# EAGLE board BSPD (EAGLE 8.6.2)
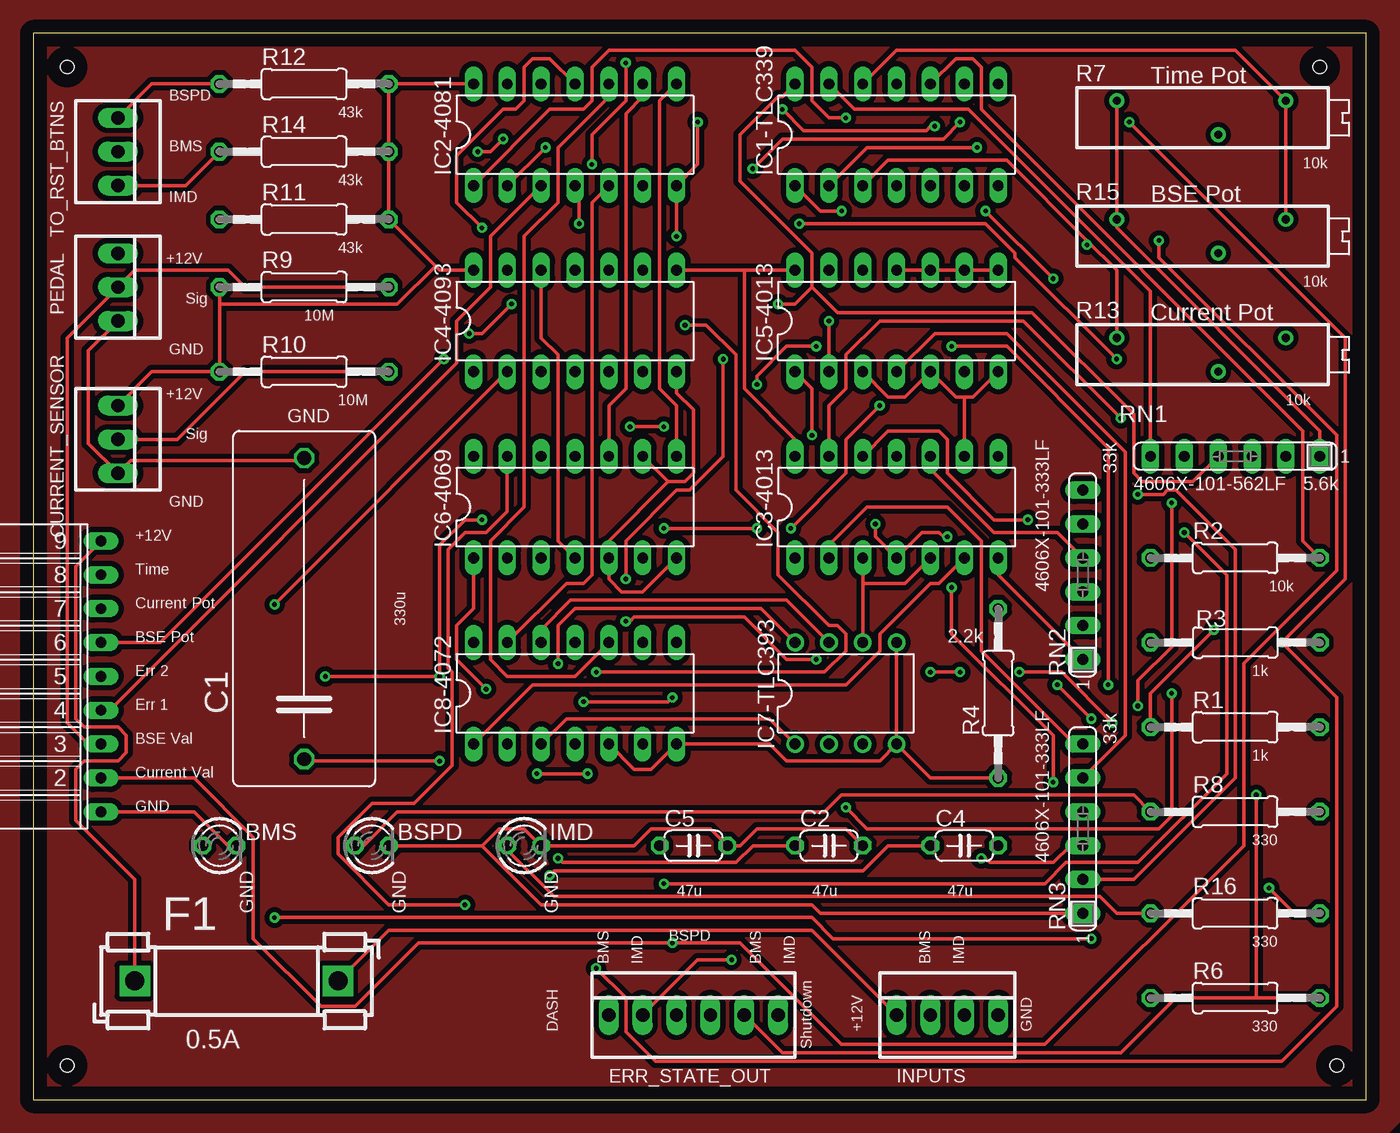
[diagram p0: board, top side]
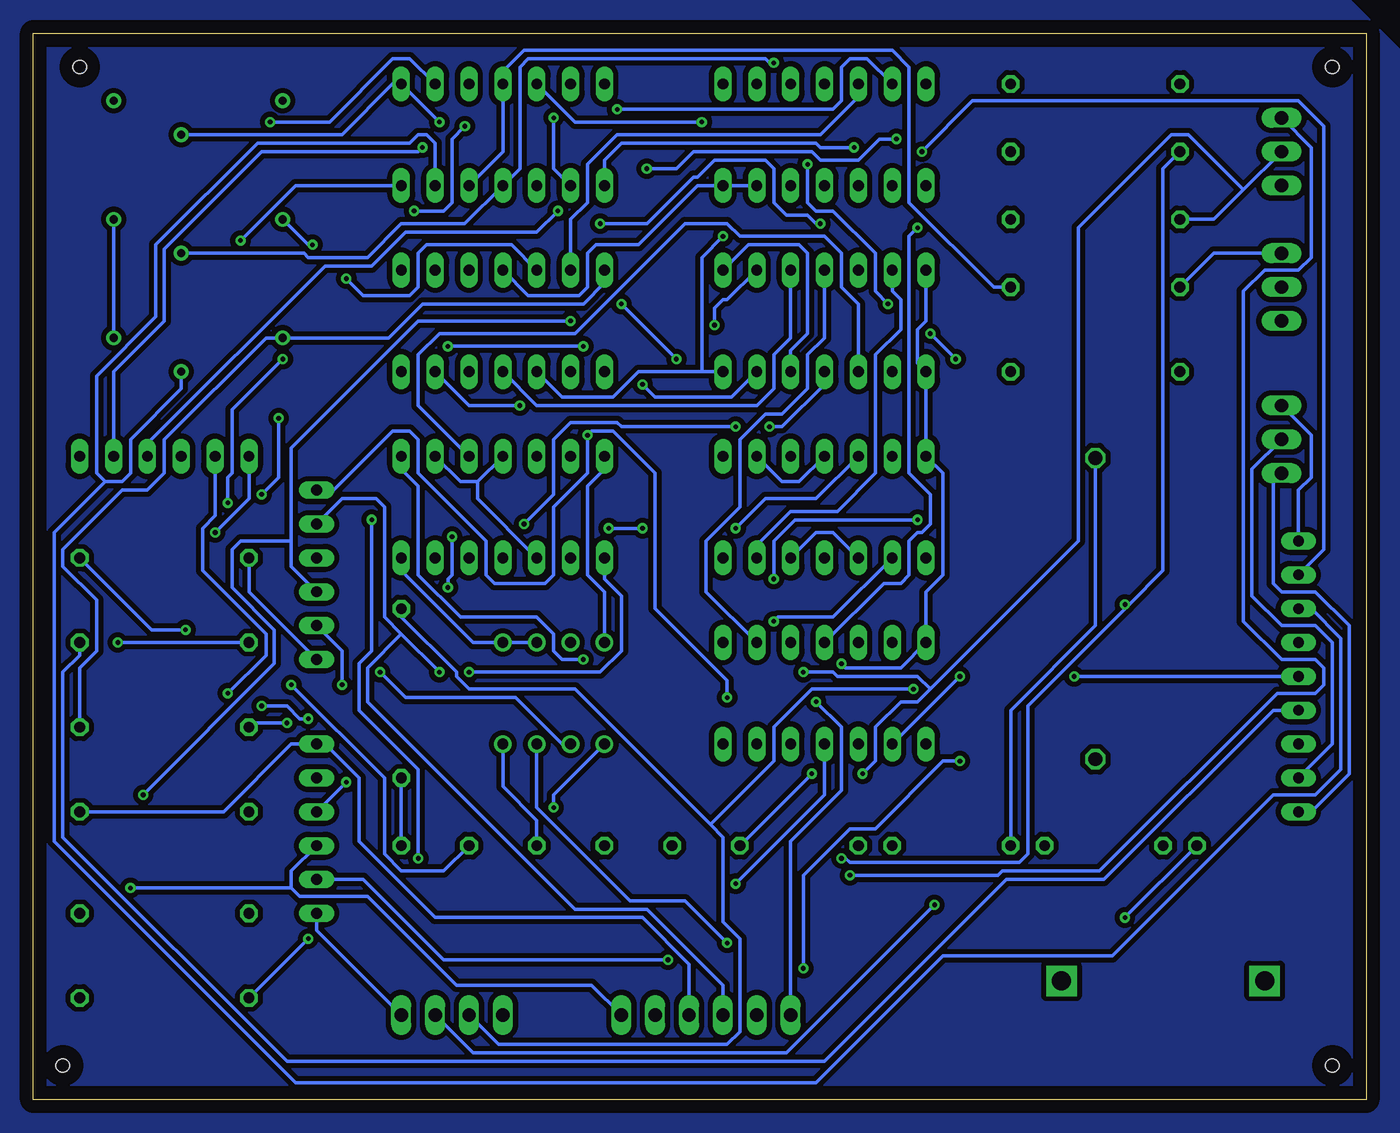
[diagram p1: board, bottom side, seen from below]

Size 100 x 80 mm. Coordinates in mm from the lower left corner, seen from the top.
Outline: 0,0 100,0 100,80 0,80 0,0
Copper layers (1*16): Top 0.035mm / dielectric 1.5mm / Bottom 0.035mm
Design rules "default *": minimum track width 10mil, minimum drill 0.35mm, track to track 15mil, track to pad 15mil, pad to pad 15mil, via to via 15mil, smd to smd 15mil, copper to edge 40mil, drill to drill 6mil, minimum pad ring 10mil, minimum via ring 8mil, stop-mask expansion 4mil, vias tented up to drill 0mil, thermal gap 10mil
Holes 1 mm at 2.54,77.47 2.54,2.54 97.79,2.54 96.52,77.47

## Footprints (pad centres in the part's own frame; a part is rotated, then mirrored left to right if it is on the bottom)
LED3MM = drill 0.813 octagon: A -1.27,0; K 1.27,0
C225-108X268 = drill 1.016 octagon: 1 -11.303,0; 2 11.303,0
C050-024X044 = drill 0.813 octagon: 1 -2.54,0; 2 2.54,0
22-23-2031 = drill 1 long: 1 -2.54,0; 2 0,0; 3 2.54,0
22-23-2061 = drill 1 long: 1 -6.35,0; 2 -3.81,0; 3 -1.27,0; 4 1.27,0; 5 3.81,0; 6 6.35,0
FUSE_HOLDER_5X20MM = drill 1.422 pad 2.286 square: 1 0,0; 2 15.24,0
DIL14 = drill 0.813 long: 1 -7.62,-3.81; 2 -5.08,-3.81; 3 -2.54,-3.81; 4 0,-3.81; 5 2.54,-3.81; 6 5.08,-3.81; 7 7.62,-3.81; 8 7.62,3.81; 9 5.08,3.81; 10 2.54,3.81; 11 0,3.81; 12 -2.54,3.81; 13 -5.08,3.81; 14 -7.62,3.81
DIL08 = drill 0.813 pad 1.27: 1 -3.81,-3.81; 2 -1.27,-3.81; 3 1.27,-3.81; 4 3.81,-3.81; 5 3.81,3.81; 6 1.27,3.81; 7 -1.27,3.81; 8 -3.81,3.81
22-23-2041 = drill 1 long: 1 -3.81,0; 2 -1.27,0; 3 1.27,0; 4 3.81,0
0207/12 = drill 0.813 octagon: 1 -6.35,0; 2 6.35,0
RTRIM3006P = drill 0.61: 1 -7.62,1.27; 2 0,-1.27; 3 5.08,1.27
SIL6 = drill 0.813 long: 1 -6.35,0; 2 -3.81,0; 3 -1.27,0; 4 1.27,0; 5 3.81,0; 6 6.35,0
FE09W = drill 0.813 long: 1 -10.16,0; 2 -7.62,0; 3 -5.08,0; 4 -2.54,0; 5 0,0; 6 2.54,0; 7 5.08,0; 8 7.62,0; 9 10.16,0

## Placement (x,y rotation side)
BMS  LED3  [LED3MM]  13.97,19.05 0 top
BSPD  LED2  [LED3MM]  25.4,19.05 0 top
C1  330u  [C225-108X268]  20.32,36.83 90 top
C2  47uF  [C050-024X044]  59.69,19.05 0 top
C4  47uF  [C050-024X044]  69.85,19.05 0 top
C5  47uF  [C050-024X044]  49.53,19.05 0 top
CURRENT_SENSOR  22-23-2031  [22-23-2031]  6.35,49.53 270 top
ERR_STATE_OUT  22-23-2061  [22-23-2061]  49.53,6.35 0 top
F1  FUSEBLANK_5X20MM  [FUSE_HOLDER_5X20MM]  7.62,8.89 0 top
IC1-TLC339  TLC339P  [DIL14]  64.77,72.39 0 top
IC2-4081  4081N  [DIL14]  40.64,72.39 0 top
IC3-4013  4013N  [DIL14]  64.77,44.45 0 top
IC4-4093  4093N  [DIL14]  40.64,58.42 0 top
IC5-4013  4013N  [DIL14]  64.77,58.42 0 top
IC6-4069  4069N  [DIL14]  40.64,44.45 0 top
IC7-TLC393  TLC393P  [DIL08]  60.96,30.48 0 top
IC8-4072  4072N  [DIL14]  40.64,30.48 0 top
IMD  LED4  [LED3MM]  36.83,19.05 0 top
INPUTS  22-23-2041  [22-23-2041]  68.58,6.35 0 top
PEDAL  22-23-2031  [22-23-2031]  6.35,60.96 270 top
R1  1k  [0207/12]  90.17,27.94 0 top
R2  10k  [0207/12]  90.17,40.64 0 top
R3  1k  [0207/12]  90.17,34.29 180 top
R4  2.2k  [0207/12]  72.39,30.48 90 top
R6  330  [0207/12]  90.17,7.62 0 top
R7  10k  [RTRIM3006P]  88.9,73.66 0 top
R8  330  [0207/12]  90.17,21.59 0 top
R9  10M  [0207/12]  20.32,60.96 0 top
R10  10M  [0207/12]  20.32,54.61 0 top
R11  43k  [0207/12]  20.32,66.04 0 top
R12  43k  [0207/12]  20.32,76.2 0 top
R13  10k  [RTRIM3006P]  88.9,55.88 0 top
R14  43k  [0207/12]  20.32,71.12 0 top
R15  10k  [RTRIM3006P]  88.9,64.77 0 top
R16  330  [0207/12]  90.17,13.97 0 top
RN1  5.1k  [SIL6]  90.17,48.26 180 top
RN2  33k  [SIL6]  78.74,39.37 90 top
RN3  33k  [SIL6]  78.74,20.32 90 top
S7042-ND  [FE09W]  5.08,31.75 90 top
TO_RST_BTNS  22-23-2031  [22-23-2031]  6.35,71.12 270 top

## Library data of the parts
BMS BSPD IMD = led
C1 C2 C4 C5 = rcl; SPICEPREFIX: C
CURRENT_SENSOR PEDAL TO_RST_BTNS = con-molex; MF: MOLEX; MPN: 22-23-2031; OC_FARNELL: 1462950; OC_NEWARK: 30C0862
ERR_STATE_OUT = con-molex; MF: MOLEX; MPN: 22-23-2061; OC_FARNELL: 1462922; OC_NEWARK: 27C1933
F1 = fuse; OC_FARNELL: unknown; OC_NEWARK: unknown
IC1-TLC339 IC7-TLC393 = linear
IC2-4081 IC3-4013 IC4-4093 IC5-4013 IC6-4069 IC8-4072 = 40xx
INPUTS = con-molex; MF: MOLEX; MPN: 22-23-2041; OC_FARNELL: 1462920; OC_NEWARK: 38C0355
R1-R4 R6 R8-R12 R14 R16 = rcl; SPICEPREFIX: R
R7 R13 R15 = rcl; SPICEMODEL: X; SPICEPREFIXL: POT
RN1-RN3 = resistor-sil; OC_FARNELL: unknown; OC_NEWARK: unknown
S7042-ND = con-lsta; OC_FARNELL: unknown; OC_NEWARK: unknown

## Nets
+12V: CURRENT_SENSOR.1 F1.1 IC1-TLC339.3 IC2-4081.14 IC3-4013.14 IC4-4093.1 IC4-4093.5 IC4-4093.8 IC4-4093.14 IC5-4013.14 IC6-4069.14 IC7-TLC393.8 IC8-4072.14 PEDAL.1 R1.2 R7.1 R9.1 R10.1 R11.2 R12.2 R13.1 R14.2 R15.1 RN1.1 S7042-ND.9
BMS: IC6-4069.13 INPUTS.3
BMS_DASH: ERR_STATE_OUT.1 IC5-4013.1 RN2.6
BMS_ERR: ERR_STATE_OUT.5 IC5-4013.2 R6.2 RN2.3
BMS_RST: IC4-4093.10 IC5-4013.4 RN3.5
BSE: IC1-TLC339.5 IC1-TLC339.11 PEDAL.2 R9.2 S7042-ND.3
BSE_POT: IC1-TLC339.4 R15.2 S7042-ND.6
BSE_UNPLUGGED: IC1-TLC339.13 IC8-4072.4 RN1.6
BSPD_DASH: ERR_STATE_OUT.3 IC3-4013.1 RN2.5
BSPD_ERR: ERR_STATE_OUT.4 IC3-4013.2 R8.2 RN3.6
BSPD_RST: IC3-4013.4 IC4-4093.4 RN3.4
CURR_UNPLUGGED: IC7-TLC393.1 IC8-4072.3 RN1.5
CURRENT_POT: IC1-TLC339.6 R13.2 S7042-ND.7
CURRENT_SENSOR: CURRENT_SENSOR.2 IC1-TLC339.7 IC7-TLC393.3 R10.2 S7042-ND.2
ERROR_1: IC2-4081.3 R3.1 S7042-ND.4
ERROR_2: IC1-TLC339.14 IC8-4072.2 RN1.4 S7042-ND.5
ERROR_3: IC3-4013.6 IC8-4072.1
ESO_BMS_RST: C5.1 IC4-4093.9 R11.1 TO_RST_BTNS.2
ESO_BSPD_RST: C4.1 IC4-4093.6 R12.1 TO_RST_BTNS.1
ESO_IMD_RST: C2.1 IC4-4093.2 R14.1 TO_RST_BTNS.3
GND: BMS.K BSPD.K C1.2 C2.2 C4.2 C5.2 CURRENT_SENSOR.3 IC1-TLC339.12 IC2-4081.6 IC2-4081.7 IC3-4013.3 IC3-4013.5 IC3-4013.7 IC3-4013.9 IC3-4013.11 IC4-4093.7 IC5-4013.3 IC5-4013.5 IC5-4013.7 IC5-4013.8 IC5-4013.9 IC5-4013.10 IC5-4013.11 IC6-4069.3 IC6-4069.5 IC6-4069.7 IC6-4069.9 IC6-4069.11 IC7-TLC393.4 IC7-TLC393.5 IC7-TLC393.6 IC8-4072.5 IC8-4072.7 IMD.K INPUTS.4 PEDAL.3 R2.1 R4.1 R7.3 R13.3 R15.3 RN2.1 RN3.1 S7042-ND.1
IMD: IC6-4069.1 INPUTS.2 R4.2
IMD_DASH: ERR_STATE_OUT.2 IC3-4013.13 RN3.2
IMD_ERR: ERR_STATE_OUT.6 IC3-4013.12 R16.2 RN3.3
IMD_RST: IC3-4013.10 IC4-4093.3 RN2.4
N$1: IC1-TLC339.2 IC2-4081.1 RN1.2
N$2: IC1-TLC339.1 IC2-4081.2 RN1.3
N$4: F1.2 INPUTS.1
N$5: IC3-4013.8 IC6-4069.2
N$6: C1.1 IC1-TLC339.9 R3.2
N$7: IC7-TLC393.7 IC8-4072.12
N$8: IC4-4093.11 IC8-4072.9
N$9: BMS.A R6.1
N$10: IC4-4093.12 IC6-4069.4
N$11: IC2-4081.10 IC8-4072.10
N$12: IC2-4081.11 IC8-4072.11
N$13: IC4-4093.13 IC6-4069.6
N$14: IC5-4013.6 IC6-4069.12
N$15: IMD.A R16.1
N$16: IC2-4081.9 IC6-4069.10
N$17: IC2-4081.8 IC6-4069.8
N$19: IC2-4081.5 IC8-4072.13
N$21: BSPD.A R8.1
N$22: IC2-4081.12 IC5-4013.13
N$23: IC2-4081.13 IC5-4013.12
N$24: IC2-4081.4 RN2.2
TIMED_POT: IC1-TLC339.8 R7.2 S7042-ND.8
UNPLUG: IC1-TLC339.10 IC7-TLC393.2 R1.1 R2.2

## Tracks (layer width: path | path; a pad name or v marks a point on that pad's centre or on a via)
+12V  (via drill 0.35)
  Top 0.254: IC4-4093.14 30.48,62.23 30.16,62.55 | 30.16,62.55 R11.2 R14.2 R12.2 IC2-4081.14 | R9.1 13.97,59.69 | 13.97,59.69 R10.1 8.89,54.61 CURRENT_SENSOR.1 | F1.1 7.62,16.51 3.17,20.95 3.17,24.77 3.81,25.4 6.35,25.4 6.99,26.04 6.99,27.3 6.35,27.94 3.81,27.94 3.17,28.57 3.17,40.01 S7042-ND.9 | 30.16,62.55 27.3,59.69 13.97,59.69 | R7.1 R15.1 81.28,65.41 96.52,50.16 RN1.1 | IC1-TLC339.3 64.14,70.48 73.03,70.48 79.06,64.45 | 79.06,64.45 81.28,62.23 R13.1 | IC5-4013.14 53.34,62.23 | 53.34,62.23 IC4-4093.8 | IC3-4013.14 57.15,49.53 53.34,53.34 53.34,62.23 | 79.06,64.45 v79.06,64.14 | v39.37,32.7 39.37,35.56 40.64,36.83 54.61,36.83 IC7-TLC393.8
  Bottom 0.254: IC4-4093.14 33.02,58.42 33.66,57.78 33.66,55.24 IC4-4093.1 IC6-4069.14 31.75,46.99 31.75,39.37 33.02,38.1 IC8-4072.14 34.92,32.38 39.05,32.38 v39.37,32.7 | PEDAL.1 11.43,63.5 R9.1 | S7042-ND.9 5.08,45.72 4.13,46.67 4.13,49.85 CURRENT_SENSOR.1 | IC7-TLC393.8 57.15,38.1 58.42,39.37 58.42,46.04 57.15,47.31 IC3-4013.14 | IC4-4093.5 43.18,56.2 41.91,57.47 41.91,63.5 42.55,64.14 46.35,64.14 IC4-4093.8 | IC5-4013.14 57.15,61.28 58.74,59.69 70.8,59.69 73.34,57.15 R13.1 82.55,57.15 90.17,49.53 90.17,46.99 91.44,45.72 93.34,45.72 97.79,41.27 97.79,40.01 95.25,37.47 95.25,33.66 96.52,32.38 R1.2 | R15.1 79.38,64.14 v79.06,64.14
BMS  (via drill 0.35)
  Top 0.254: IC6-4069.13 35.56,44.13 33.97,42.55 32.38,42.55 31.11,41.27 31.11,32.38 31.43,32.07 31.43,25.08 28.57,22.23 25.4,22.23 22.86,19.68 22.86,18.41 26.67,14.61 v32.38,14.61
  Bottom 0.254: v32.38,14.61 43.5,3.49 66.99,3.49 INPUTS.3
BMS_DASH  (via drill 0.35)
  Top 0.254: v58.42,49.85 58.42,53.34 IC5-4013.1 | v41.27,29.84 47.62,29.84 v47.94,30.16
  Bottom 0.254: RN2.6 77.47,45.72 73.03,50.16 71.75,50.16 71.12,49.53 71.12,46.99 66.04,41.91 66.04,39.37 65.41,38.73 61.59,38.73 60.96,39.37 60.96,44.45 58.42,46.99 v58.42,49.85 58.1,50.16 56.52,50.16 53.34,46.99 53.34,36.83 47.94,31.43 v47.94,30.16 | ERR_STATE_OUT.1 43.18,19.37 39.37,23.18 39.37,27.94 v41.27,29.84
BMS_ERR  (via drill 0.35)
  Top 0.254: v59.69,58.42 IC5-4013.2 | 91.76,7.62 85.72,7.62 81.6,3.49 56.2,3.49 ERR_STATE_OUT.5 | 91.76,7.62 R6.2 | 91.76,7.62 v91.76,22.86
  Bottom 0.254: v59.69,58.42 71.12,58.42 80.64,48.9 80.64,41.91 | 80.64,41.91 80.64,40.01 RN2.3 | 80.64,41.91 84.45,41.91 85.09,41.27 85.09,38.42 81.92,35.24 81.92,32.7 v91.76,22.86
BMS_RST
  Top 0.254: RN3.5 81.92,27.3 81.92,48.58 73.03,57.47 67.63,57.47 IC5-4013.4
  Bottom 0.254: IC4-4093.10 43.18,57.15 44.45,55.88 44.45,53.34 45.72,52.07 62.23,52.07 IC5-4013.4
BSE
  Top 0.254: S7042-ND.3 4.13,26.67 2.54,28.26 2.54,57.15 PEDAL.2 7.62,62.23 14.61,62.23 15.88,60.96 R9.2
  Bottom 0.254: IC1-TLC339.5 64.77,71.12 IC1-TLC339.11 64.77,77.15 63.18,78.74 35.56,78.74 34.29,77.47 34.29,67.31 27.94,60.96 R9.2
BSE_POT  (via drill 0.35)
  Top 0.254: S7042-ND.6 9.53,34.29 v30.8,55.56 | v32.7,57.47 33.66,57.47 v35.88,59.69 | v41.91,70.17 41.91,72.39 44.45,74.93 v44.45,77.79
  Bottom 0.254: R15.2 79.69,63.5 79.38,63.18 74.93,63.18 72.39,65.72 67.63,65.72 IC1-TLC339.4 63.5,69.85 63.5,77.47 62.87,78.11 45.09,78.11 44.77,77.79 v44.45,77.79 | v32.7,57.47 v30.8,55.56 | v35.88,59.69 36.83,60.64 36.83,63.5 40.01,66.67 41.27,66.67 41.91,67.31 v41.91,70.17
BSE_UNPLUGGED  (via drill 0.35)
  Top 0.254: v47.31,16.19 75.88,16.19 77.47,17.78 82.87,17.78 89.53,24.45 89.53,39.37 v86.36,42.55 | IC1-TLC339.13 61.59,74.3 70.17,74.3 83.82,60.64 RN1.6
  Bottom 0.254: IC8-4072.4 40.64,22.86 v47.31,16.19 | v86.36,42.55 83.82,45.09 RN1.6
BSPD_DASH  (via drill 0.35)
  Top 0.254: v69.53,32.07 v67.31,32.07
  Bottom 0.254: IC3-4013.1 57.15,39.05 55.88,37.78 55.88,33.66 57.47,32.07 v67.31,32.07 | 72.39,34.92 73.66,36.2 73.66,44.45 74.3,45.09 76.83,45.09 RN2.5 | 72.39,34.92 v69.53,32.07 | ERR_STATE_OUT.3 48.26,8.57 53.98,14.29 59.37,14.29 74.93,29.84 74.93,32.38 72.39,34.92
BSPD_ERR
  Top 0.254: IC3-4013.2 59.69,41.59 62.55,44.45 68.58,44.45 71.12,41.91 71.12,33.66 78.11,26.67 RN3.6
  Bottom 0.254: R8.2 85.72,21.59 80.64,26.67 RN3.6 78.11,26.67 75.56,24.13 75.56,19.37 69.85,13.65 54.29,13.65 50.8,10.16 ERR_STATE_OUT.4
BSPD_RST  (via drill 0.35)
  Top 0.254: v47.31,50.48 v44.77,50.48 | v63.18,43.18 63.18,42.23 IC3-4013.4 66.67,42.55 67.94,42.55 68.26,42.23 v68.58,42.23 | v76.52,23.81 76.52,27.3 68.9,34.92 v68.9,38.42
  Bottom 0.254: IC4-4093.4 40.64,53.66 43.81,50.48 v44.77,50.48 | v47.31,50.48 55.88,50.48 56.2,50.8 59.69,50.8 60.96,49.53 60.96,45.4 v63.18,43.18 | v76.52,23.81 RN3.4 | v68.9,38.42 68.9,39.05 68.58,39.37 v68.58,42.23
CURR_UNPLUGGED  (via drill 0.35)
  Top 0.254: IC8-4072.3 40.01,28.57 55.24,28.57 IC7-TLC393.1 | v85.41,30.48 85.41,21.27 84.45,20.32 62.55,20.32 v60.96,21.91
  Bottom 0.254: RN1.5 86.36,43.81 87.31,42.86 87.31,39.69 82.55,34.92 82.55,33.34 v85.41,30.48 | v60.96,21.91 60.96,22.86 IC7-TLC393.1
CURRENT_POT
  Bottom 0.254: R13.2 88.9,53.34 92.71,49.53 92.71,46.99 93.34,46.35 94.61,46.35 | 94.61,46.35 95.25,46.99 95.25,54.29 90.81,58.74 90.81,64.14 83.19,71.75 71.75,71.75 71.12,72.39 70.48,72.39 69.85,71.75 IC1-TLC339.6 | S7042-ND.7 4.13,36.83 1.91,34.61 1.91,24.77 3.81,22.86 6.99,22.86 19.05,10.79 31.75,10.79 41.27,1.27 80.33,1.27 98.42,19.37 98.42,42.55 94.61,46.35
CURRENT_SENSOR  (via drill 0.35)
  Top 0.254: R10.2 15.88,54.61 10.79,49.53 CURRENT_SENSOR.2 | S7042-ND.2 12.06,24.13 16.51,19.68 16.51,12.06 21.59,6.99 24.13,6.99 28.89,11.75 v47.94,11.75 53.02,11.75 60.64,4.13 75.88,4.13 90.81,19.05 90.81,32.7 97.79,39.69 97.79,49.85 84.45,63.18 v84.45,64.45
  Bottom 0.254: S7042-ND.2 2.54,26.67 2.54,34.29 3.81,35.56 6.35,35.56 8.57,37.78 8.57,47.31 CURRENT_SENSOR.2 | IC7-TLC393.3 62.23,21.91 55.24,14.92 51.12,14.92 v47.94,11.75 | IC1-TLC339.7 80.33,68.58 v84.45,64.45
ERROR_1
  Top 0.254: S7042-ND.4 5.71,29.21 31.75,55.24 31.75,58.42 34.29,60.96 34.29,64.77 IC2-4081.3
  Bottom 0.254: R3.1 96.52,33.34 97.79,32.07 97.79,19.68 80.96,2.86 40.64,2.86 26.99,16.51 19.68,16.51 6.99,29.21 S7042-ND.4
ERROR_2  (via drill 0.35)
  Top 0.254: v21.91,31.75 v30.48,31.75 30.48,41.59 32.38,43.5 v33.66,43.5 | IC1-TLC339.14 56.2,75.25 55.88,75.25 53.02,72.39 53.02,68.9 58.42,63.5 58.42,60.96 | 58.42,60.96 60.33,59.05 74.93,59.05 82.55,51.44 82.55,46.99 83.19,46.35 87,46.35 RN1.4 | v44.45,39.05 44.45,41.91 48.26,45.72 49.21,45.72 51.75,48.26 v51.75,55.56 | v55.88,59.69 57.15,59.69 58.42,60.96
  Bottom 0.254: v21.91,31.75 S7042-ND.5 | IC8-4072.2 v30.48,31.75 | v33.66,43.5 42.86,43.5 44.45,41.91 v44.45,39.05 | v55.88,59.69 v51.75,55.56
ERROR_3
  Top 0.254: IC8-4072.1 37.47,31.11 60.96,31.11 63.5,33.66 63.5,34.92 67.31,38.73 67.94,38.73 IC3-4013.6
ESO_BMS_RST  (via drill 0.35)
  Top 0.254: v37.78,24.45 v41.59,24.45 | v48.9,58.1 50.48,58.1 52.7,55.88 52.7,45.72 55.88,42.55 55.88,39.37 59.69,35.56 60.33,35.56 60.96,34.92 60.96,33.66 59.37,32.07 v42.23,32.07
  Bottom 0.254: R11.1 11.43,66.04 9.21,68.26 | TO_RST_BTNS.2 9.21,68.26 | v41.59,24.45 C5.1 | v37.78,24.45 36.83,25.4 36.83,27.94 34.92,29.84 33.66,29.84 32.7,30.8 | 32.7,30.8 21.59,41.91 21.59,65.41 14.61,72.39 13.34,72.39 9.21,68.26 | IC4-4093.9 47.94,60.01 48.26,60.01 48.9,59.37 v48.9,58.1 | v42.23,32.07 40.01,32.07 39.69,31.75 33.66,31.75 32.7,30.8
ESO_BSPD_RST  (via drill 0.35)
  Top 0.254: C4.1 64.14,19.05 62.23,17.14 39.05,17.14 v38.73,16.83 | v54.29,53.66 54.29,54.29 56.52,56.52 v58.74,56.52 | v68.9,56.52 73.03,56.52 80.64,48.9 v80.64,31.11 | R12.1 8.89,76.2 TO_RST_BTNS.1
  Bottom 0.254: v38.73,16.83 27.62,16.83 27.3,17.14 20,17.14 6.67,30.48 3.81,30.48 3.17,31.11 3.17,32.38 3.81,33.02 6.35,33.02 9.21,35.88 9.21,60.64 7.62,62.23 5.08,62.23 4.13,63.18 4.13,71.44 TO_RST_BTNS.1 | IC4-4093.6 47.62,52.7 53.34,52.7 v54.29,53.66 | v68.9,56.52 v58.74,56.52 | v80.64,31.11 73.66,24.13 73.66,18.41 72.39,17.14 69.22,17.14 C4.1
ESO_IMD_RST  (via drill 0.35)
  Top 0.254: C2.1 53.98,19.05 52.7,17.78 39.69,17.78 v39.37,18.1 | v18.1,37.15 IC4-4093.2 | TO_RST_BTNS.3 11.43,68.58 R14.1
  Bottom 0.254: v39.37,18.1 39.05,18.1 38.73,17.78 26.04,17.78 25.4,18.41 25.4,29.53 17.78,37.15 | 17.78,37.15 15.24,39.69 15.24,69.85 R14.1 | 17.78,37.15 v18.1,37.15
GND  (via drill 0.35)
  Top 0.254: BMS.K 14.61,19.05 12.06,21.59 S7042-ND.1 | PEDAL.3 4.13,56.2 4.13,49.21 CURRENT_SENSOR.3 7.3,47.94 20.32,47.94 C1.2 | R15.3 R7.3 90.17,78.74 64.77,78.74 IC1-TLC339.12 | IC5-4013.11 IC5-4013.10 IC5-4013.9 IC5-4013.8 | IC6-4069.7 45.72,38.1 44.13,38.1 43.18,39.05 IC6-4069.5 43.18,41.91 47.62,46.35 | IC4-4093.7 48.26,53.02 49.53,51.75 49.53,46.99 48.9,46.35 47.62,46.35 | IC6-4069.9 47.62,46.35 | IC3-4013.7 72.39,39.37 RN2.1 | IC5-4013.3 64.14,52.7 65.41,52.7 IC5-4013.5 69.22,52.7 69.85,52.7 | IC5-4013.7 70.48,52.7 69.85,52.7 | 69.85,52.7 IC3-4013.9 | 33.66,19.05 BSPD.K | 33.66,19.05 34.92,20.32 36.83,20.32 IMD.K 45.09,19.05 46.35,20.32 50.8,20.32 C5.2 53.02,19.05 54.29,20.32 60.96,20.32 C2.2 | IC8-4072.5 45.09,24.77 46.35,24.77 IC8-4072.7 55.24,26.67 56.52,25.4 63.5,25.4 IC7-TLC393.4 | IC7-TLC393.6 62.23,38.73 | 62.23,38.73 IC3-4013.3 | IC7-TLC393.5 IC7-TLC393.4 | IC3-4013.5 65.41,38.73 62.23,38.73 | R4.1 67.31,24.13 IC7-TLC393.4 | RN3.1 59.05,13.97 58.42,14.61 38.1,14.61 33.66,19.05 | v48.26,64.77 IC2-4081.7 49.85,70.17 v49.85,73.34
  Bottom 0.254: S7042-ND.1 4.13,21.59 1.27,24.45 1.27,35.56 3.81,38.1 6.35,38.1 6.99,38.73 6.99,46.35 CURRENT_SENSOR.3 | R15.3 R13.3 | IC2-4081.6 IC2-4081.7 50.16,68.58 54.61,64.14 57.78,64.14 58.42,63.5 58.42,60.96 59.05,60.33 62.87,60.33 IC5-4013.11 | IC6-4069.3 40.01,42.55 41.27,42.55 IC6-4069.5 | IC6-4069.11 42.55,46.35 43.81,46.35 IC6-4069.9 | R2.1 83.82,38.1 RN2.1 | 66.67,46.35 IC3-4013.11 | 66.67,46.35 67.94,46.35 IC3-4013.9 | RN3.1 78.74,12.7 INPUTS.4 | R4.1 C4.2 | IC7-TLC393.6 IC7-TLC393.5 66.99,34.29 72.39,39.69 IC3-4013.7 | C2.2 62.23,20.95 64.77,23.5 IC7-TLC393.4 | 66.67,46.35 66.67,45.09 IC3-4013.3 | 49.85,54.61 54.61,54.61 56.52,52.7 60.33,52.7 IC5-4013.3 | 49.85,54.61 IC4-4093.7 | v48.26,64.77 49.85,63.18 49.85,54.61 | IC1-TLC339.12 59.37,73.34 v49.85,73.34 | C1.2 20.32,35.56 26.67,29.21 BSPD.K
IMD  (via drill 0.35)
  Top 0.254: IC6-4069.1 33.02,36.83 31.75,35.56 31.75,33.02 v33.97,30.8
  Bottom 0.254: R4.2 72.39,36.2 68.26,32.07 68.26,31.75 67.31,30.8 59.37,30.8 49.21,20.64 | 49.21,20.64 48.26,19.68 48.26,13.34 46.99,12.06 46.99,5.08 47.94,4.13 65.09,4.13 INPUTS.2 | v33.97,30.8 41.59,30.8 44.45,27.94 44.45,25.4 49.21,20.64
IMD_DASH  (via drill 0.35)
  Top 0.254: v52.39,10.48 49.85,10.48 ERR_STATE_OUT.2 | IC3-4013.13 59.69,52.07 60.96,53.34 60.96,55.88 63.5,58.42 74.3,58.42 v81.6,51.12 | v82.87,45.4 84.77,45.4 85.09,45.72 85.72,45.72 90.17,41.27 90.17,24.13 82.55,16.51 RN3.2
  Bottom 0.254: RN3.2 75.25,16.51 69.22,10.48 v52.39,10.48 | v81.6,51.12 81.6,46.67 v82.87,45.4
IMD_ERR  (via drill 0.35)
  Top 0.254: IC3-4013.12 64.14,50.16 67.94,50.16 68.58,49.53 68.58,46.99 72.07,43.5 v74.61,43.5 | v71.12,18.1 71.44,18.1 71.75,17.78 76.52,17.78 77.79,19.05 RN3.3 | R16.2 94.61,13.97 v92.71,15.88
  Bottom 0.254: RN3.3 80.64,17.14 80.64,15.88 | 80.64,15.88 80.01,15.24 74.93,15.24 68.26,8.57 58.1,8.57 ERR_STATE_OUT.6 | v74.61,43.5 74.61,33.66 75.56,32.7 75.56,29.21 71.12,24.77 v71.12,18.1 | 80.64,15.88 v92.71,15.88
IMD_RST
  Top 0.254: IC3-4013.10 67.31,47.31 72.07,42.55 76.83,42.55 RN2.4
  Bottom 0.254: IC4-4093.3 38.1,59.69 39.37,60.96 39.37,63.5 40.64,64.77 46.99,64.77 47.94,65.72 51.12,65.72 59.37,57.47 69.53,57.47 71.12,55.88 71.12,52.07 IC3-4013.10
N$1  (via drill 0.35)
  Top 0.254: IC2-4081.1 38.73,74.3 41.27,74.3 41.91,74.93 41.91,77.47 43.18,78.74 57.15,78.74 58.42,77.47 58.42,74.93 59.69,73.66 v60.96,73.66 | v70.8,71.44 62.55,71.44 IC1-TLC339.2
  Bottom 0.254: v60.96,73.66 60.96,69.85 IC1-TLC339.2 | RN1.2 93.98,54.61 90.17,58.42 90.17,63.82 82.87,71.12 71.12,71.12 v70.8,71.44
N$2  (via drill 0.35)
  Top 0.254: v38.42,71.44 IC2-4081.2 | v60.64,66.67 59.05,66.67 IC1-TLC339.1
  Bottom 0.254: v38.42,71.44 40.96,71.44 41.27,71.75 55.88,71.75 57.15,70.48 IC1-TLC339.1 | RN1.3 91.44,49.21 78.11,62.55 74.61,62.55 72.07,65.09 62.23,65.09 v60.64,66.67
N$3
  pour Top: -3.81,82.55 -3.81,-1.27 -1.27,-3.81 100.33,-3.81 105.41,1.27 105.41,82.55
N$4
  Top 0.254: INPUTS.1 58.42,12.7 26.67,12.7 F1.2
N$5  (via drill 0.35)
  Top 0.254: v44.45,35.88 44.77,35.88 45.09,36.2 53.34,36.2 56.52,33.02 v58.74,33.02
  Bottom 0.254: IC6-4069.2 40.01,36.2 44.13,36.2 v44.45,35.88 | v58.74,33.02 60.33,33.02 60.96,33.66 60.96,34.92 62.23,36.2 67.94,36.2 71.12,39.37 71.12,46.04 72.39,47.31 IC3-4013.8
N$6  (via drill 0.35)
  Top 0.254: v82.23,73.34 98.42,57.15 98.42,39.05 v93.66,34.29 97.79,30.16 97.79,6.99 93.66,2.86 46.67,2.86 44.45,5.08 44.45,7.62 v42.23,9.84 | v30.48,25.4 20.32,25.4 C1.1
  Bottom 0.254: v93.66,34.29 R3.2 | v82.23,73.34 77.79,73.34 73.03,78.11 71.75,78.11 IC1-TLC339.9 | v30.48,25.4 31.75,25.4 36.83,20.32 38.73,20.32 42.23,16.83 v42.23,9.84
N$7
  Top 0.254: IC8-4072.12 38.1,35.24 40.32,37.47 56.52,37.47 IC7-TLC393.7
N$8
  Bottom 0.254: IC4-4093.11 40.64,57.15 41.91,55.88 41.91,53.34 43.81,51.44 45.09,51.44 46.99,49.53 46.99,44.45 49.53,41.91 49.53,38.1 IC8-4072.9
N$9  (via drill 0.35)
  Top 0.254: v79.38,12.06 60.01,12.06 58.42,13.65 v18.1,13.65
  Bottom 0.254: v79.38,12.06 R6.1 | BMS.A v18.1,13.65
N$10
  Top 0.254: IC4-4093.12 38.1,57.15 39.37,55.88 39.37,41.91 IC6-4069.4
N$11
  Top 0.254: IC8-4072.10 40.64,31.75 35.56,31.75 34.29,33.02 34.29,41.91 36.83,44.45 36.83,64.77 39.37,67.31 39.37,71.44 43.18,75.25 IC2-4081.10
N$12  (via drill 0.35)
  Top 0.254: v33.66,65.41 31.75,67.31 31.75,70.8 35.24,74.3 36.2,74.3 36.83,74.93 36.83,77.47 37.47,78.11 38.73,78.11 IC2-4081.11
  Bottom 0.254: IC8-4072.11 36.2,38.73 34.92,38.73 34.29,39.37 34.29,41.91 33.66,42.55 33.34,42.55 32.7,43.18 32.7,45.4 34.29,46.99 34.29,64.77 v33.66,65.41
N$13
  Bottom 0.254: IC4-4093.13 35.56,60.64 34.92,60.01 34.92,57.78 36.83,55.88 36.83,46.99 39.69,44.13 43.18,44.13 45.72,41.59 IC6-4069.6
N$14  (via drill 0.35)
  Top 0.254: v54.29,42.86 v47.31,42.86 | v56.83,42.86 60.96,46.99 60.96,49.53 v63.5,52.07
  Bottom 0.254: IC6-4069.12 41.27,45.09 45.09,45.09 v47.31,42.86 | v56.83,42.86 v54.29,42.86 | v63.5,52.07 67.31,52.07 IC5-4013.6
N$15
  Top 0.254: R16.1 81.28,13.97 80.01,15.24 39.05,15.24 35.56,18.73 IMD.A
N$16
  Top 0.254: IC6-4069.10 43.18,52.07 44.45,53.34 44.45,73.98 45.72,75.25 IC2-4081.9
N$17
  Top 0.254: IC6-4069.8 48.26,52.07 46.99,53.34 46.99,74.93 IC2-4081.8
N$18
  pour Bottom: 0,81.28 -6.35,74.93 -6.35,0 -3.81,-2.54 104.14,-2.54 104.14,81.28 101.6,83.82 2.54,83.82
N$19
  Top 0.254: IC8-4072.13 40.01,38.73 41.27,38.73 41.91,39.37 41.91,67.31 IC2-4081.5
N$21
  Top 0.254: BSPD.A 24.77,19.05 27.3,21.59 59.37,21.59 60.64,22.86 82.55,22.86 R8.1
N$22
  Bottom 0.254: IC5-4013.13 59.69,66.04 58.42,67.31 58.42,70.17 56.2,72.39 40.96,72.39 38.1,75.25 IC2-4081.12
N$23  (via drill 0.35)
  Top 0.254: v71.44,66.67 v76.52,61.59 | v67.63,73.03 67.31,73.03 66.99,72.71 57.78,72.71 v56.2,74.3
  Bottom 0.254: IC5-4013.12 64.14,64.14 70.48,64.14 71.12,63.5 71.12,60.96 71.75,60.33 75.25,60.33 v76.52,61.59 | v71.44,66.67 69.22,66.67 68.58,67.31 68.58,72.07 v67.63,73.03 | v56.2,74.3 40.01,74.3 39.37,74.93 39.37,77.47 38.73,78.11 37.47,78.11 IC2-4081.13
N$24  (via drill 0.35)
  Top 0.254: v79.38,28.57 v76.83,31.11 | v82.87,29.53 82.87,31.43 85.41,33.97 v85.41,44.77 | v81.28,55.56 73.66,63.18 73.66,63.5 71.44,65.72 v57.47,65.72 | v40.96,65.72 40.96,68.26 IC2-4081.4
  Bottom 0.254: RN2.2 76.83,33.66 v76.83,31.11 | v79.38,28.57 80.01,28.57 80.96,29.53 v82.87,29.53 | v85.41,44.77 85.41,46.67 85.09,46.99 85.09,51.75 v81.28,55.56 | v57.47,65.72 53.98,65.72 50.48,69.22 50.16,69.22 48.9,70.48 45.09,70.48 44.45,69.85 44.45,67.31 43.5,66.36 41.91,66.36 41.27,65.72 v40.96,65.72
TIMED_POT  (via drill 0.35)
  Top 0.254: v33.34,71.12 34.29,71.12 v35.24,72.07 | v53.98,69.85 56.2,72.07 68.26,72.07 v69.53,73.34
  Bottom 0.254: R7.2 76.83,72.39 73.03,76.2 IC1-TLC339.8 v69.53,73.34 | S7042-ND.8 3.17,41.27 3.17,73.03 5.08,74.93 29.53,74.93 v33.34,71.12 | v35.24,72.07 36.51,72.07 38.1,70.48 40.96,70.48 41.59,71.12 50.48,71.12 51.75,69.85 v53.98,69.85
UNPLUG  (via drill 0.35)
  Top 0.254: v73.98,32.07 77.15,32.07 v80.96,28.26 | IC1-TLC339.10 69.22,78.11 70.48,78.11 71.12,77.47 71.12,74.3 95.25,50.16 95.25,41.91 R2.2 | R1.1 83.82,30.48 v88.58,35.24
  Bottom 0.254: IC7-TLC393.2 60.33,26.67 63.82,30.16 72.07,30.16 v73.98,32.07 | v80.96,28.26 83.5,28.26 R1.1 | v88.58,35.24 91.12,35.24 R2.2

## Text on the board
tNames: Time Pot | BSPD | 43k | BMS | 10k | 43k | IMD | BSE Pot | +12V | 43k | 10k | Sig | 10M | Current Pot | GND | +12V | 10M | 10k | GND | Sig | 33k | 4606X-101-562LF | 5.6k | GND | +12V | Time | 4606X-101-333LF | 10k | Current Pot | 330u | BSE Pot | 2.2k | Err 2 | 1k | Err 1 | BSE Val | 33k | 1k | Current Val | GND | 330 | 4606X-101-333LF | 47u | 47u | 47u | GND | GND | GND | BSPD | 330 | BMS | IMD | BMS | IMD | BMS | IMD | DASH | +12V | GND | 330 | 0.5A | Shutdown